# EAGLE board datalogger_small_ver2 (EAGLE 9.6.2)
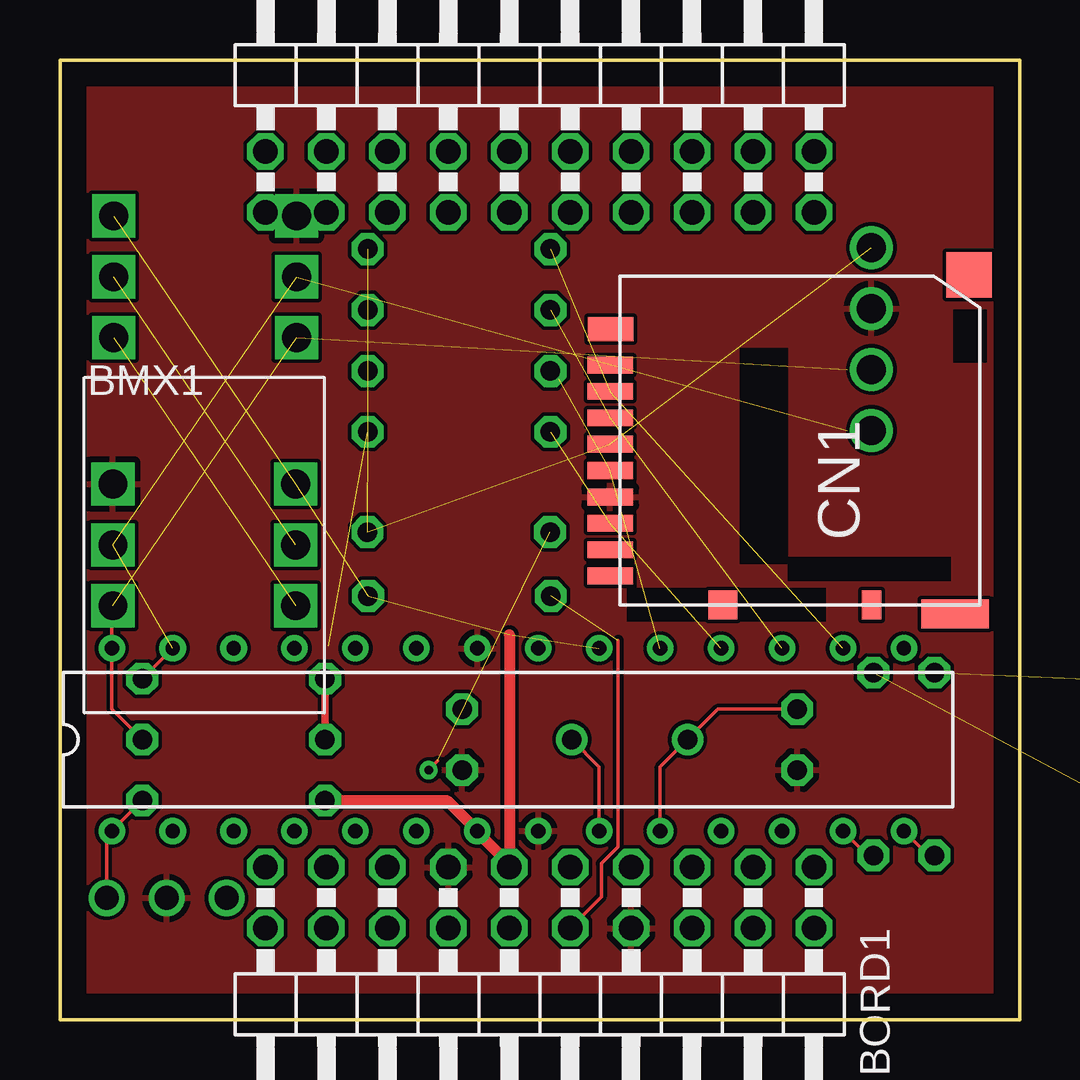
[diagram p0: board, top side]
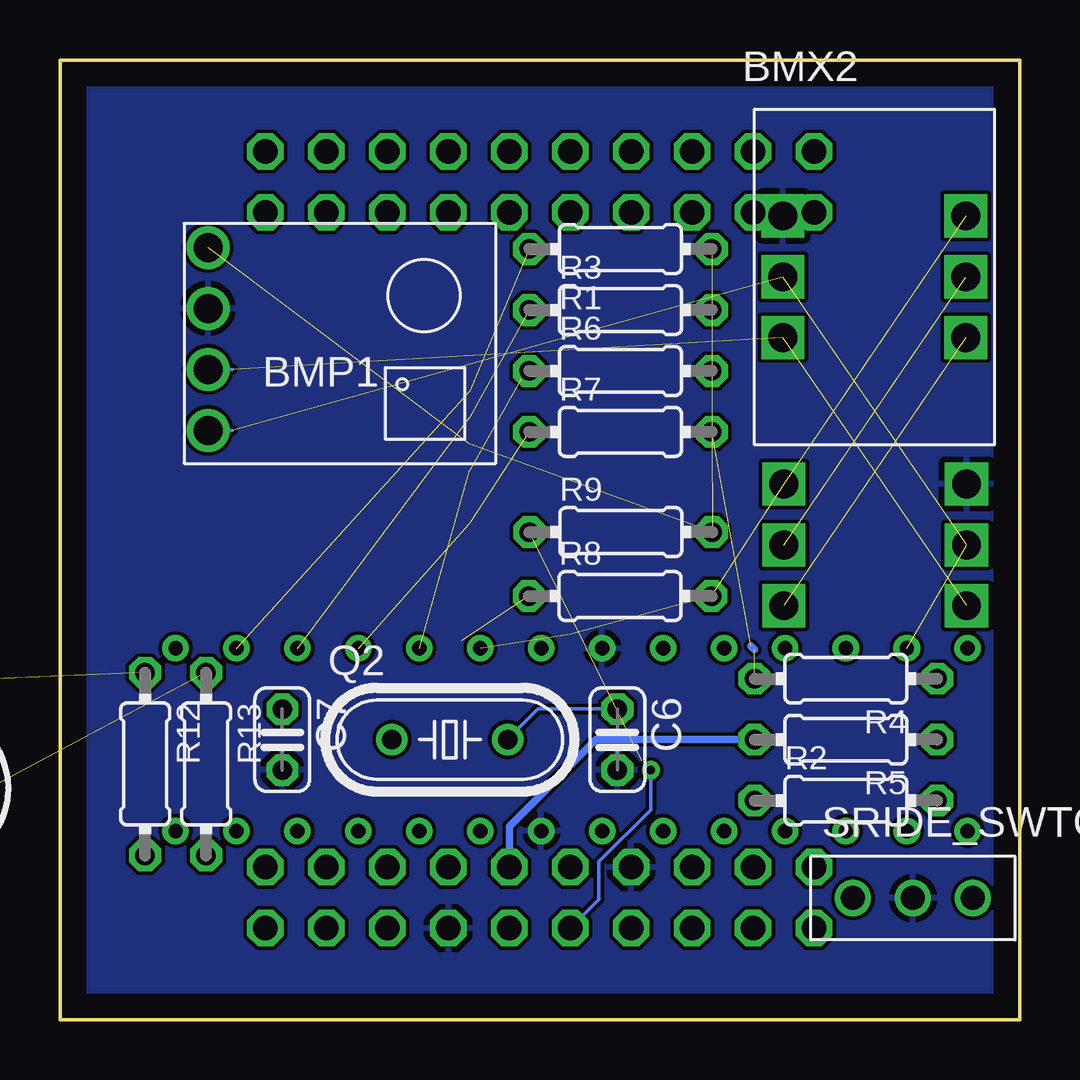
[diagram p1: board, bottom side, seen from below]

Size 40 x 40 mm. Coordinates in mm from the lower left corner, seen from the top.
Outline: 0,0 0,40 40,40 40,0 0,0
Copper layers (1*16): Top 0.035mm / dielectric 1.5mm / Bottom 0.035mm
Design rules "default": minimum track width 6mil, minimum drill 0.35mm, track to track 6mil, track to pad 6mil, pad to pad 6mil, via to via 6mil, smd to smd 6mil, copper to edge 40mil, drill to drill 6mil, minimum pad ring 10mil, minimum via ring 8mil, stop-mask expansion 4mil, vias tented up to drill 0mil, thermal gap 10mil
Net classes: 1 SIGNAL: width 0.152 mm, drill 0.152 mm, clearance 0.152 mm; 2 POWER_H: width 0.457 mm, drill 0.152 mm, clearance 0.152 mm; 3 POWER_L: width 0.305 mm, drill 0.152 mm, clearance 0.152 mm; 4 GND: width 0.305 mm, drill 0.152 mm, clearance 0.152 mm

## Footprints (pad centres in the part's own frame; a part is rotated, then mirrored left to right if it is on the bottom)
GY-68 = drill 1.2: P1 -5,4; P2 -5,1.46; P3 -5,-1.08; P4 -5,-3.62
BMX055 = drill 1.2 pad 1.5 square: 3V3 8.81,-9.53; GND 1.19,-4.46; SCL 1.19,-9.53; SDA 1.19,-7; VCC 8.81,-4.46; VCCIO 8.81,-7
2X10/90 = drill 1.016 octagon: 1 -11.43,-6.35; 2 -11.43,-3.81; 3 -8.89,-6.35; 4 -8.89,-3.81; 5 -6.35,-6.35; 6 -6.35,-3.81; 7 -3.81,-6.35; 8 -3.81,-3.81; 9 -1.27,-6.35; 10 -1.27,-3.81; 11 1.27,-6.35; 12 1.27,-3.81; 13 3.81,-6.35; 14 3.81,-3.81; 15 6.35,-6.35; 16 6.35,-3.81; 17 8.89,-6.35; 18 8.89,-3.81; 19 11.43,-6.35; 20 11.43,-3.81
C025-024X044 = drill 0.813 octagon: 1 -1.27,0; 2 1.27,0
DM3AT = smd 0.7 x 1.9: CD/DAT3 2.2,6.4; CLK -1.1,6.4; CMD 1.1,6.4; DAT0 -3.3,6.4; DAT1 -4.4,6.4; DAT2 3.3,6.4; DET_B -5.5,6.4; VDD 0,6.4; VSS -2.2,6.4 | smd 1.2 x 0.8: DET_A -6.7,-4.5 | smd 1 x 1.9: P$9 4.8,6.381 | smd 1.2 x 1.2: P$11 -6.7,1.7 | smd 1.2 x 2.8: P$13 -7.081,-7.973 | smd 1.9 x 1.9: P$14 7.054,-8.562
LED5MM = drill 0.813 octagon: A -1.27,0; K 1.27,0
HC49/S = drill 0.813: 1 -2.413,0; 2 2.413,0
0204/7 = drill 0.813 octagon: 1 -3.81,0; 2 3.81,0
SRIDE_SWITCH = drill 1: L -2.5,0; LR 0,0; R 2.5,0
ATMEGA328P = drill 0.6: AREF 17.78,7.62; AVCC 20.32,7.62; D1TX 5.08,0; D2 7.62,0; D3 10.16,0; D4 12.7,0; D5 25.4,0; D6 27.94,0; D7 30.48,0; D8 33.02,0; D9 33.02,7.62; D14 12.7,7.62; D15 10.16,7.62; D16 7.62,7.62; D17 5.08,7.62; GND1 17.78,0; GND2 15.24,7.62; MISOD12 25.4,7.62; MOSID11 27.94,7.62; PB6 20.32,0; PB7 22.86,0; RESET 0,0; RXD0 2.54,0; SCKD13 22.86,7.62; SCLD19 0,7.62; SDAD18 2.54,7.62; SSD10 30.48,7.62; VCC 15.24,0

## Placement (x,y rotation side)
BMP1  BMP180  [GY-68]  28.83,28.18 0 bottom
BMX1  BMX055  [BMX055]  1.02,26.78 0 top
BMX2  BMX055  [BMX055]  11.05,37.96 0 bottom
BORD1  [2X10/90]  20,0 180 top
BORD4  [2X10/90]  20,40 0 top
C6  22p  [C025-024X044]  16.76,11.67 270 bottom
C7  22p  [C025-024X044]  30.73,11.67 270 bottom
CN1  DM3AT  [DM3AT]  29.34,23.99 90 top
LED4  [LED5MM]  51.69,15.1 90 bottom  (outside the outline)
LED6  [LED5MM]  45.34,9.64 90 bottom  (outside the outline)
Q2  16mhz  [HC49/S]  23.75,11.67 0 bottom
R1  10k  [0204/7]  16.64,32.12 0 bottom
R2  [0204/7]  7.24,9.13 0 bottom
R3  10k  [0204/7]  16.64,29.57 0 bottom
R4  10k  [0204/7]  7.24,14.21 180 bottom
R5  10k  [0204/7]  7.24,11.67 180 bottom
R6  10k  [0204/7]  16.64,27.04 0 bottom
R7  10k  [0204/7]  16.64,24.5 0 bottom
R8  0  [0204/7]  16.65,17.65 0 bottom
R9  0  [0204/7]  16.62,20.32 0 bottom
R12  100  [0204/7]  36.45,10.65 270 bottom
R13  100  [0204/7]  33.91,10.65 270 bottom
SRIDE_SWTCH2  SRIDE_SWITCH  [SRIDE_SWITCH]  4.45,5.06 0 bottom
U$6  ATMEGA238P  [ATMEGA328P]  2.16,7.86 0 top

## Library data of the parts
BMP1 = BMP180
BMX1 BMX2 = BMX055
BORD1 BORD4 = pinhead
C6 C7 = rcl; SPICEPREFIX: C
CN1 = microSD
LED4 LED6 = led
Q2 = crystal; OC_FARNELL: 1667008; OC_NEWARK: unknown
R1-R9 R12 R13 = rcl; SPICEPREFIX: R
SRIDE_SWTCH2 = Sride Switch
U$6 = atmega328p

## Nets
3V3 [POWER_L]: BMX1.3V3 BMX2.3V3
+3V3 [POWER_L]: BMP1.P1 BORD1.9 CN1.VDD R1.2 R3.2 R4.2 R5.2 R6.2 R7.2 R9.2
+5V [POWER_H]: BMX1.VCC BMX2.VCC BORD1.11 R2.1 R8.2 U$6.AVCC U$6.VCC
CLK [SIGNAL]: CN1.CLK R6.1 U$6.SCKD13
GND [GND]: BMP1.P2 BMX1.GND BMX2.GND BORD1.8 BORD1.13 C6.2 C7.2 CN1.VSS LED4.K LED6.K SRIDE_SWTCH2.LR U$6.GND1 U$6.GND2
LED1.0 [SIGNAL]: R13.2 U$6.D7
LED1.1 [SIGNAL]: R12.2 U$6.D8
N$1 [SIGNAL]: LED6.A R13.1
N$2 [SIGNAL]: C6.1 Q2.2 U$6.PB6
N$4 [SIGNAL]: C7.1 Q2.1 U$6.PB7
N$6 [SIGNAL]: BORD1.10 R8.1
N$7 [SIGNAL]: LED4.A R12.1
N$8 [SIGNAL]: R2.2 SRIDE_SWTCH2.R U$6.RESET
N$9 [SIGNAL]: BORD1.12 R9.1
SCL [SIGNAL]: BMP1.P3 BMX1.SCL BMX2.SCL R5.1 U$6.SCLD19
SD-MISO [SIGNAL]: CN1.DAT0 R7.1 U$6.MISOD12
SD-MOSI [SIGNAL]: CN1.CMD R3.1 U$6.MOSID11
SD-SS [SIGNAL]: CN1.CD/DAT3 R1.1 U$6.SSD10
SDA [SIGNAL]: BMP1.P4 BMX1.SDA BMX2.SDA R4.1 U$6.SDAD18
VCCIO [SIGNAL]: BMX1.VCCIO BMX2.VCCIO

## Tracks (layer width: path | path; a pad name or v marks a point on that pad's centre or on a via)
3V3  (1 unrouted)
+3V3  (8 unrouted)
  Top 0.305: R5.2 R4.2
  Bottom 0.305: R5.2 17.65,11.67 21.27,8.05 BORD1.9 | 11.21,15.58 11.05,15.42
+5V  (4 unrouted)
  Top 0.457: R2.1 16.13,9.13 U$6.VCC 17.4,7.81 18.73,6.48 BORD1.11 18.73,16.05
CLK  (2 unrouted)
  Top 0.152: 20.79,26.7 R6.1
GND
  pour Top: -6.35,-10.43 -6.35,42.91 2.81,52.07 48.26,52.07 58.42,41.91 58.42,-4.08 45.72,-17.78 1,-17.78
  pour Bottom: -3.81,52.07 47.99,52.07 57.15,42.91 57.15,-4.08 46.99,-15.24 4.81,-15.24 -3.81,-6.62
LED1.0
  Top 0.152: U$6.D7 33.66,6.84 R13.2
LED1.1
  Top 0.152: U$6.D8 36.2,6.84 R12.2
N$1  (1 unrouted)
N$2
  Top 0.152: U$6.PB6 22.48,10.53 Q2.2
  Bottom 0.152: Q2.2 20.07,12.94 C6.1
N$4
  Top 0.152: C7.1 27.43,12.94 Q2.1 25.02,10.53 U$6.PB7
N$6  (1 unrouted)
  Top 0.152: BORD1.10 22.57,5.11 22.57,6.51 23.26,7.2 23.26,15.8
N$7  (1 unrouted)
N$8
  Top 0.152: R2.2 U$6.RESET 1.95,7.64 SRIDE_SWTCH2.R
N$9  (via drill 0.35)  (1 unrouted)
  Top 0.152: 15.75,10.78 v15.37,10.4
  Bottom 0.152: v15.37,10.4 15.37,8.75 17.53,6.59 17.53,5.01 BORD1.12
SCL  (2 unrouted)
  Top 0.152: R5.1 2.16,12.94 U$6.SCLD19 2.16,17.2 BMX1.SCL
  Bottom 0.152: 32.82,27.1 BMP1.P3
SD-MISO  (2 unrouted)
  Top 0.152: R7.1
SD-MOSI  (2 unrouted)
SD-SS  (2 unrouted)
SDA  (3 unrouted)
  Top 0.152: U$6.SDAD18 R4.1
  Bottom 0.152: 32.82,24.56 BMP1.P4
VCCIO  (1 unrouted)